# Altium PCB backup.PcbDoc (part 3 of 3)
Units mm, origin at the board's own origin, x right, y up, seen from the top; angles counter-clockwise.
Board outline 28.94 x 32.03 mm, 4 copper layers (Top Layer, Inner Layer 1, Inner Layer 2, Bottom Layer), stack 1.586 mm thick; 135 components, 83 nets, 442 pads, 355 vias.
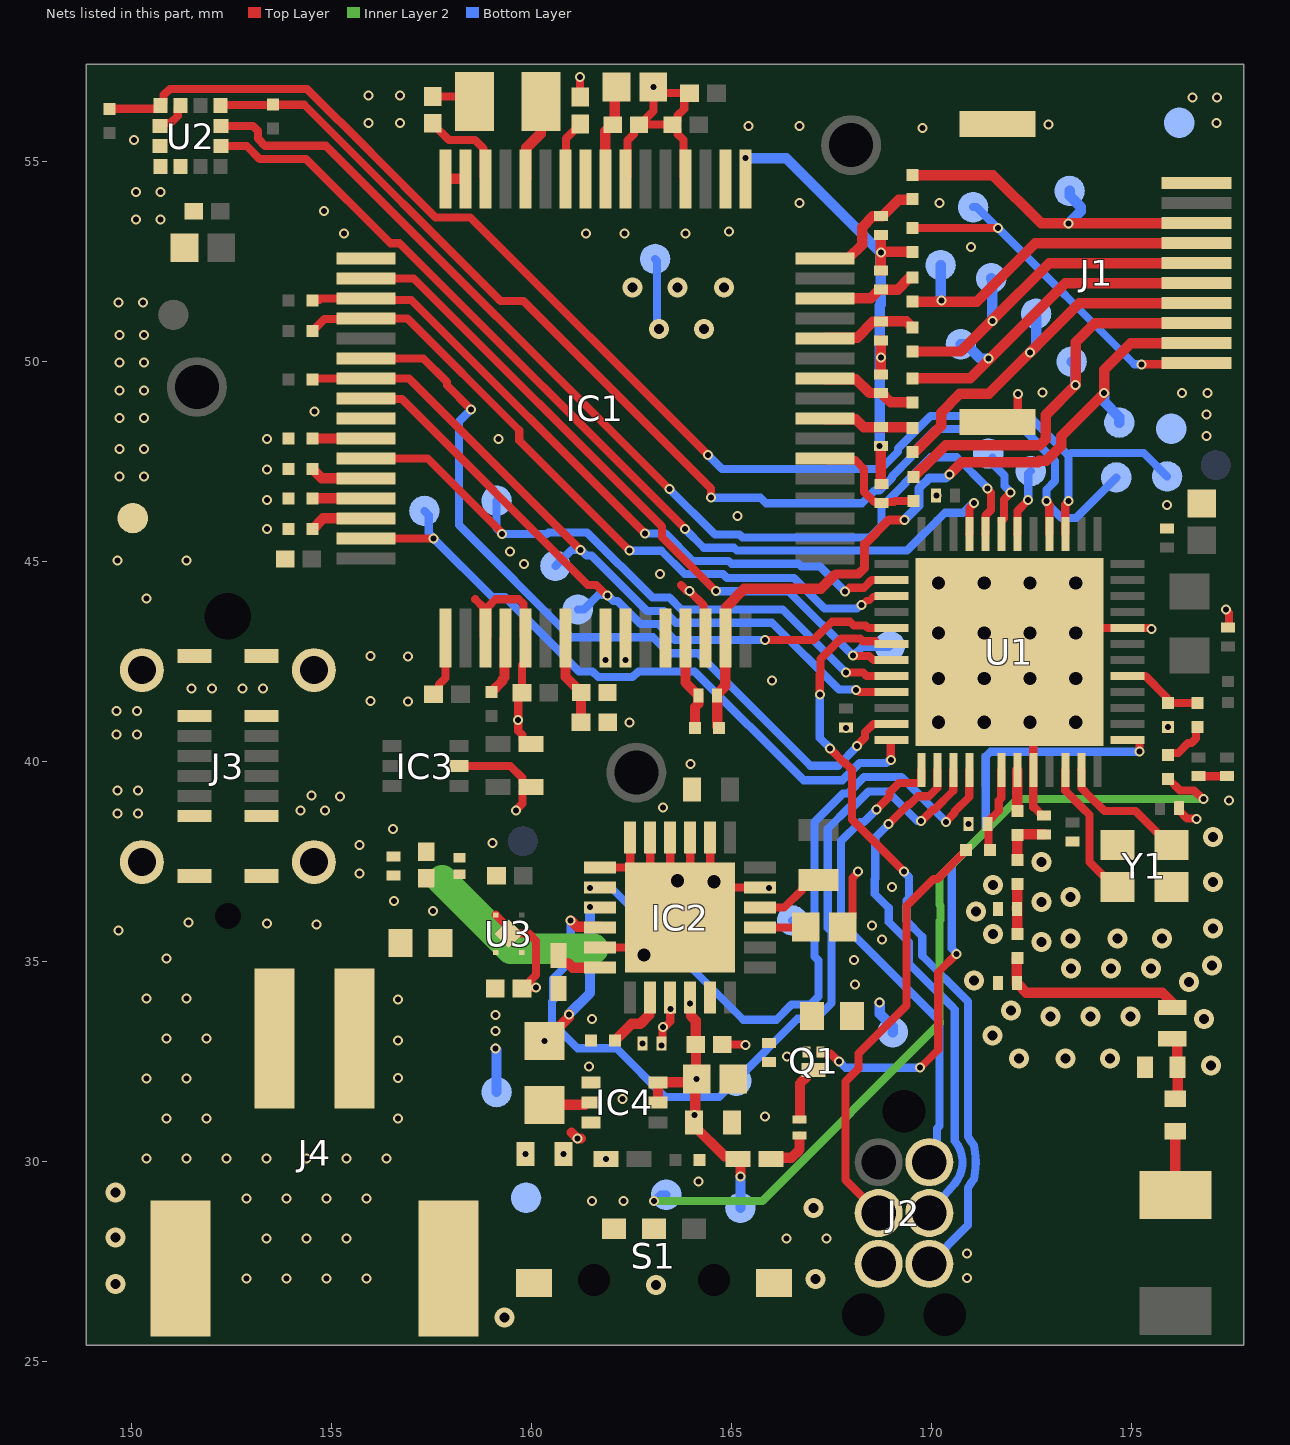
[diagram p4: the nets of this part, all layers, seen from the top]

## Via types
v1: diameter 0.25, hole 0.15, Top Layer to Bottom Layer, 295 vias
v2: diameter 0.5, hole 0.25, Top Layer to Bottom Layer, 41 vias
v3: diameter 0.66, hole 0.33, Top Layer to Bottom Layer, 19 vias

## Nets (pads, with @x,y where several pads share a name; then routed paths per layer and width w, separated by ;. In a path a pad name is that pad's centre, name@x,y a point inside that pad or via, vN(x,y) a via of type N, cw(c..) or ccw(c..) an arc to the next point about the centre after c; other vN are vias at no path point) (continued)
GND: C1.2 C2.2 C3.2 C4.2 C5.2 C6.2 C7.2 C8.2 C9.2 C10.1 C11.2 C12.1 C13.2 C14.2 C15.2 C16.2 C17.2 C18.2 C19.2 C20.2 C22.1 C23.1 C24.1 C25.1 C27.2 C28.1 C29.1 C30.1 C31.1 C32.2 C33.2 C34.2 C35.2 C42.2 C43.2 C44.2 C45.2 C46.1 C47.1 D1.2 IC1.18 IC1.20 IC1.23 IC1.25 IC1.31 IC1.32 IC1.33 IC1.41 IC1.49 IC1.51 IC1.53 IC1.57 IC1.58 IC1.60 IC1.62 IC2.2 IC2.3 IC2.4 IC2.5 IC2.6 IC2.7 IC2.11 IC2.23 IC2.25 IC3.2 IC4.4 J1.10 J1.11 J1.12 J2.5 J3.A1 J3.A12 J3.B1 J3.B12 J3.S1 J3.S2 J3.S3 J3.S4 J4.1 J4.MP1 J4.MP2 L7.1 Q1.3 R1.1 R2.2 R17.2 R18.2 R19.1 R24.1 R25.1 R26.1 R27.1 R29.2 S1.4 S1.5 TP6.1 TP15.1 TP18.1 TP28.1 TP31.1 U1.32 U1.44 U1.49 U2.3 U2.5 U2.6 U2.7 U2.8 U3.2 U3.5 Y1.2 Y1.4 | length 52.5
  Top Layer w0.203: U2.5@150.723,55.876 150.797,55.949 150.982,55.949 151.162,56.129 151.162,56.315 U2.3@151.236,56.389 ; C14.2@157.536,56.615 158.455,56.615 C13.2@158.58,56.49 ; C34.2@157.557,41.675 157.572,41.675 157.69,41.794 157.69,41.917 157.853,42.079 IC1.49@157.853,43.08 ; IC3.2@158.188,39.875 159.474,39.875 159.776,39.573 159.776,39.448 R17.2@159.874,39.35 ; 158.597,44.046 158.804,43.839 158.804,43.129 IC1.51@158.853,43.08 158.901,43.129 158.901,43.839 159.108,44.046 159.685,44.046 159.804,43.927 159.804,43.129 IC1.53@159.853,43.08 159.853,42.493 159.767,42.407 C27.2@159.767,41.712 159.673,41.618 159.673,41.03 v1(159.664,41.021) 159.673,41.012 159.673,40.75 159.776,40.648 159.776,40.523 159.874,40.425 R18.2@159.987,40.425 ; U3.2@159.111,36.157 159.436,35.832 U3.5@159.436,35.687 159.939,35.687 160.119,35.507 160.119,34.649 C44.2@159.802,34.332 ; v1(159.614,38.76) 159.614,38.773 159.776,38.936 159.776,39.252 R17.2@159.874,39.35 ; R17.2@159.987,39.35 R17.2@159.874,39.35 ; v1(160.122,34.341) 160.113,34.332 C44.2@159.802,34.332 ; v1(161.217,57.1) 161.218,57.099 C17.2@161.219,56.601 C17.2@161.219,56.601 ; IC2.11@161.723,35.337 162.631,35.337 v3(162.814,35.154) ; IC2.7@161.723,37.337 IC2.25@162.473,37.337 ; IC1.23@162.353,54.556 162.401,54.605 162.401,55.516 162.564,55.679 162.564,55.802 162.672,55.91 C19.2@162.692,55.91 C19.2@162.712,55.91 ; IC2.6@162.473,38.087 IC2.25@162.473,37.337 ; IC2.5@162.973,38.087 IC2.25@162.973,36.837 ; IC2.4@163.473,38.087 IC2.25@163.473,36.337 ; 163.744,44.399 163.871,44.272 163.919,44.272 163.944,44.247 v1(163.957,44.247) ; IC1.20@163.853,54.556 163.804,54.605 163.804,55.534 163.659,55.679 163.659,55.802 C1.2@163.551,55.91 ; v1@163.957,44.268 v1(163.957,44.247) ; C2.2@163.958,56.698 C2.2@163.943,56.698 ; IC2.3@163.973,38.087 163.973,36.337 IC2.25@163.723,36.087 IC2.25@163.473,36.337 ; IC1.62@164.353,43.08 164.304,43.129 164.304,43.9 v1(163.957,44.247) ; IC2.2@164.473,38.087 164.473,37.076 v3(164.567,36.982) 164.712,36.837 IC2.23@165.723,36.837 ; C4.2@164.77,32.918 165.321,32.918 165.341,32.898 v1(165.354,32.898) ; C6.2@167.785,35.85 168.028,36.093 168.028,37.079 168.173,37.224 v1(168.173,37.236) ; J1.11@171.65,48.475 171.938,48.475 172.161,48.698 v1(172.161,49.174) ; C23.1@172.822,38.642 172.772,38.642 172.575,38.838 172.55,38.838 U1.32@172.55,39.775 172.55,42.125 U1.49@171.95,42.725 172.55,43.325 U1.44@174.9,43.325 174.902,43.323 175.463,43.323 175.488,43.298 v1(175.501,43.298) ; C8.2@176.187,38.825 176.187,38.775 176.396,38.566 176.623,38.566 v1(176.632,38.557) ; C28.1@176.684,39.621 C29.1@177.395,39.621 ; v1(177.368,43.79) 177.368,43.777 177.444,43.701 177.444,43.341 C22.1@177.419,43.341 ; C44.2@159.802,34.332 159.787,34.332 C44.2@159.771,34.315 159.786,34.315 C44.2@159.802,34.332 ; IC2.25@162.473,37.337 IC2.25@162.973,36.837 ; C19.2@162.712,55.91 C1.2@163.531,55.91 C1.2@163.551,55.91 ; C19.2@162.712,55.91 163.051,56.249 v1(163.051,56.85) 163.203,56.698 C2.2@163.943,56.698 ; IC2.25@162.973,36.837 IC2.25@163.473,36.337 ; C1.2@163.551,55.91 163.659,56.019 163.659,56.142 163.824,56.307 163.824,56.579 C2.2@163.943,56.698
  Top Layer w0.262: IC1.32@157.853,54.556 IC1.31@158.353,54.556
  Bottom Layer w0.203: TP31.1@163.093,52.553 163.144,52.502 163.144,50.851 v2(163.195,50.8)
  other v1: 152.886,27.071 153.886,27.071 154.886,27.071 155.886,27.071 170.891,27.076 170.891,27.686 153.386,28.071 154.386,28.071 155.386,28.071 166.386,28.071 167.386,28.071 152.886,29.071 153.886,29.071 154.886,29.071 155.886,29.071 164.186,29.489 150.386,30.071 151.386,30.071 152.386,30.071 153.386,30.071 154.386,30.071 155.386,30.071 156.386,30.071 159.85,30.175 150.886,31.071 151.886,31.071 156.667,31.064 165.837,31.11 162.281,31.547 150.386,32.071 151.386,32.071 156.667,32.08 161.442,32.368 166.395,32.614 162.78,32.944 156.667,33.02 150.886,33.071 151.886,33.071 161.519,33.553 156.667,34.036 150.386,34.071 151.386,34.071 150.886,35.071 149.682,35.763 154.635,35.916 153.391,35.941 151.435,35.966 157.544,36.25 156.566,36.5 165.938,36.83 159.029,37.948 170.934,38.43 163.297,38.837 177.444,39.014 163.976,39.923 167.864,40.83 175.922,40.854 162.458,40.97 155.981,41.504 156.914,41.493 166.014,42.012 161.849,42.525 162.357,42.525 155.981,42.621 156.914,42.611 150.386,44.071 163.22,44.679 159.817,44.933 149.657,45.009 151.384,45.009 159.461,45.237 153.391,45.796 165.151,46.126 175.888,46.404 153.391,46.533 170.129,46.634 149.708,47.117 150.317,47.117 153.391,47.295 149.708,47.803 150.317,47.803 153.391,48.057 159.182,48.057 176.886,48.133 149.709,48.579 150.319,48.579 176.886,48.666 154.577,48.741 176.269,49.198 176.904,49.198 172.779,49.217 149.709,49.265 150.319,49.265 149.708,49.962 150.317,49.962 149.708,50.648 150.317,50.648 149.682,51.46 150.292,51.46 170.993,52.857 155.321,53.188 161.366,53.188 162.331,53.188 163.855,53.188 164.948,53.238 150.114,53.543 150.724,53.543 154.813,53.746 166.7,53.95 170.205,53.95 150.114,54.229 150.724,54.229 150.063,55.524 169.774,55.829 165.43,55.88 166.7,55.88 172.928,55.916 155.931,55.956 156.718,55.956 177.132,55.954 176.53,56.591 177.14,56.591 155.931,56.642 156.718,56.642
  other v2: 159.334,26.086 163.119,26.899 149.606,26.924 167.107,27.051 149.606,28.092 167.056,28.829 149.606,29.21 176.987,32.385 172.187,32.563 173.355,32.563 174.473,32.562 171.534,33.141 176.82,33.555 172.981,33.613 173.981,33.613 174.981,33.613 171.992,33.76 176.44,34.48 171.069,34.519 173.497,34.814 174.497,34.814 175.497,34.814 177.02,34.893 172.75,35.478 173.482,35.56 174.65,35.56 175.768,35.56 171.536,35.675 177.038,35.814 171.12,36.246 172.751,36.478 173.482,36.601 171.536,36.9 177.038,36.982 172.759,37.478 177.038,38.1 164.313,50.8 162.535,51.842 163.652,51.841 164.821,51.841
  other v3: 163.653,37.008 170.18,40.97 171.323,40.97 172.466,40.97 173.609,40.97 170.18,42.062 171.323,42.062 172.466,42.062 173.609,42.062 170.18,43.205 171.323,43.205 172.466,43.205 173.609,43.205 170.18,44.45 171.323,44.45 172.466,44.45 173.609,44.45
NetANT1_1: ANT1.1 L6.2 | length 1.6
  Top Layer w0.262: ANT1.1@176.1,29.15 L6.2@176.1,30.744
NetC6_1: C6.1 IC2.21 | length 1.1
  Top Layer w0.203: IC2.21@165.723,35.837 166.852,35.837 C6.1@166.865,35.85
NetC13_1: C13.1 IC1.28 | length 2.1
  Top Layer w0.262: IC1.28@159.853,54.556 159.872,54.575 159.872,55.328 160.23,55.686 160.23,56.479 C13.1@160.24,56.49
NetC14_1: C14.1 IC1.30 | length 2.3
  Top Layer w0.203: C14.1@157.536,55.945 157.536,55.93 157.942,55.525 158.595,55.525 158.804,55.315 158.804,54.605 IC1.30@158.853,54.556
NetC15_1: C15.1 C16.1 IC1.55 | length 2.3
  Top Layer w0.254: IC1.55@160.853,43.08 160.853,42.11 161.142,41.821 161.142,41.795 161.225,41.712 C15.1@161.245,41.712 161.242,41.709 161.242,40.978 C16.1@161.24,40.975
NetC17_1: C17.1 IC1.26 | length 1.5
  Top Layer w0.203: IC1.26@160.853,54.556 160.872,54.575 160.872,55.568 161.219,55.916 C17.1@161.219,55.931
NetC19_1: C19.1 C20.1 IC1.24 | length 2.4
  Top Layer w0.262: IC1.24@161.853,54.556 161.853,55.751 C19.1@162.012,55.91 ; C19.1@162.032,55.91 C19.1@162.012,55.91 ; C20.1@162.131,56.85 162.082,56.801 162.082,55.98 C19.1@162.012,55.91
NetC21_1: C21.1 L6.1 L7.2 | length 1.6
  Top Layer w0.262: C21.1@176.09,33.058 176.15,32.998 176.15,32.357 L7.2@176.156,32.35 176.156,31.613 L6.1@176.1,31.556
NetC23_2: C23.2 L3.2 L4.1 | length 1.3
  Top Layer w0.262: L4.1@172.15,37.525 L3.2@172.15,38.15 ; L3.2@172.168,38.168 C23.2@172.822,38.168
NetC24_2: C24.2 L4.2 L5.1 | length 1.3
  Top Layer w0.262: L5.1@172.15,35.675 172.143,35.682 172.143,36.294 C24.2@172.137,36.3 172.137,36.338 172.15,36.351 L4.2@172.15,36.925
NetC26_2: C26.2 IC1.61 R5.1 | length 2.4
  Top Layer w0.254: IC1.61@163.853,43.08 163.853,41.962 164.131,41.683 164.172,41.683 164.174,41.681 C26.2@164.174,41.635 164.172,41.633 164.172,41.432 164.094,41.354 R5.1@164.094,40.823
NetC31_2: C31.2 R6.1 U1.30 | length 2.2
  Top Layer w0.203: R6.1@171.472,37.776 171.431,37.817 171.431,38.407 C31.2@171.408,38.43 171.408,38.48 171.685,38.758 171.685,39.012 171.75,39.077 U1.30@171.75,39.775
NetC36_1: C36.1 C37.1 C38.1 C39.1 C40.1 C41.1 IC1.17 R12.2 | length 12.7
  Top Layer w0.262: C37.1@168.738,47.875 168.738,47.452 168.738,46.931 168.744,46.925 C36.1@168.75,46.925 ; C38.1@168.738,49.67 v1(168.738,50.094) C39.1@168.738,50.517 ; C40.1@168.738,52.261 v1(168.738,52.71) ; C41.1@168.738,53.15 v1(168.738,52.71) ; R12.2@169.525,52.729 168.757,52.729 v1(168.738,52.71)
  Bottom Layer w0.262: v1(165.35,55.075) 166.372,55.075 v1(168.738,52.71) 168.738,51.417 168.707,51.386 v1(168.707,47.879)
NetC36_2: C36.2 IC1.6 R10.2 | length 3
  Top Layer w0.203: IC1.6@167.341,47.568 167.389,47.52 168.1,47.52 168.311,47.309 168.311,47.253 168.321,47.243 168.321,46.731 168.577,46.474 168.727,46.474 C36.2@168.75,46.451 168.773,46.474 169.07,46.474 169.095,46.5 R10.2@169.55,46.5
NetC37_2: C37.2 IC1.8 R9.2 | length 2.3
  Top Layer w0.262: IC1.8@167.341,48.568 167.36,48.549 168.112,48.549 168.312,48.349 C37.2@168.738,48.349 169.501,48.349 R9.2@169.525,48.325
NetC38_2: C38.2 IC1.10 R8.2 | length 2.4
  Top Layer w0.262: IC1.10@167.341,49.568 167.36,49.549 168.112,49.549 168.459,49.202 168.732,49.202 C38.2@168.738,49.196 168.776,49.196 168.829,49.143 168.829,49.123 168.982,48.97 R8.2@169.525,48.97
NetC39_2: C39.2 IC1.12 R7.2 | length 2.4
  Top Layer w0.262: IC1.12@167.341,50.568 167.36,50.587 168.143,50.587 168.541,50.985 168.732,50.985 C39.2@168.738,50.991 169.374,50.991 R7.2@169.525,50.84
NetC40_2: C40.2 IC1.14 R4.2 | length 2.4
  Top Layer w0.262: IC1.14@167.341,51.568 168.481,51.568 168.7,51.787 C40.2@168.738,51.787 169.163,51.787 169.441,52.066 169.506,52.066 R4.2@169.525,52.085
NetC41_2: C41.2 IC1.16 R3.2 | length 3.1
  Top Layer w0.262: IC1.16@167.341,52.568 167.928,52.568 168.271,52.911 168.271,53.348 168.541,53.618 C41.2@168.732,53.618 ; C41.2@168.738,53.624 C41.2@168.732,53.618 ; R3.2@169.525,54.05 169.506,54.031 169.182,54.031 168.77,53.618 C41.2@168.732,53.618
NetF2_1: F2.1 J4.2
NetIC1_42: IC1.42 R24.2 | length 1.3
  Top Layer w0.262: R24.2@154.534,48.062 154.537,48.065 155.861,48.065 IC1.42@155.865,48.068
NetIC1_44: IC1.44 R25.2 | length 1.4
  Top Layer w0.262: R25.2@154.534,47.3 154.766,47.068 IC1.44@155.865,47.068
NetIC1_45: IC1.45 R26.2 | length 1.3
  Top Layer w0.262: R26.2@154.534,46.563 154.537,46.566 155.862,46.566 IC1.45@155.865,46.568
NetIC1_46: IC1.46 R27.2 | length 1.4
  Top Layer w0.262: R27.2@154.534,45.801 154.801,46.068 IC1.46@155.865,46.068
NetIC1_52: IC1.52 R20.1 | length 1.5
  Top Layer w0.254: R20.1@159.009,41.732 159.278,42 159.278,42.037 159.33,42.089 159.33,43.057 IC1.52@159.353,43.08
NetIC2_12: IC2.12 R2.1 | length 1.2
  Top Layer w0.262: R2.1@160.68,35.134 160.68,35.021 160.749,34.952 160.915,34.952 161.031,34.837 IC2.12@161.723,34.837
NetIC2_14: IC2.14 R1.2 | length 1.6
  Top Layer w0.262: R1.2@162.098,33.02 162.507,33.429 162.73,33.429 162.954,33.653 162.954,34.068 IC2.14@162.973,34.087
NetIC2_22: IC2.22 L1.2 | length 1.8
  Top Layer w0.203: IC2.22@165.723,36.337 166.324,36.337 166.777,36.79 166.777,36.852 166.95,37.025 L1.2@167.175,37.025
NetIC4_5: IC4.5 L8.1 | length 1.2
  Top Layer w0.254: L8.1@160.325,31.407 161.342,31.407 161.406,31.471 IC4.5@161.493,31.471
NetL3_1: L3.1 U1.31 | length 1
  Top Layer w0.262: L3.1@172.15,38.75 U1.31@172.15,39.775
NetLED1_1: LED1.1 Q1.1 | length 1.4
  Top Layer w0.254: LED1.1@166.718,31.066 166.718,31.943 166.883,32.108 166.883,32.233 166.931,32.281 Q1.1@167.056,32.281
NetLED1_2: LED1.2 R23.1 | length 1.3
  Top Layer w0.254: R23.1@165.869,30.023 165.929,30.082 166.504,30.082 166.708,30.287 LED1.2@166.708,30.612
NetR11_1: R11.1 R15.2 | length 1.2
  Top Layer w0.203: R11.1@175.922,40.158 175.971,40.207 176.172,40.207 176.415,40.449 176.501,40.449 176.62,40.568 176.62,40.815 R15.2@176.659,40.854
NRESET: J2.3 R6.2 | length 10.7
  Top Layer w0.203: J2.3@168.681,28.702 167.853,29.531 167.853,31.985 168.177,32.31 168.177,32.689 169.378,33.889 169.378,36.382 170.05,37.055 170.151,37.055 R6.2@170.872,37.776
NRF_ADS_CS: IC1.39 R16.1 TP10.1 U1.21 | length 18.5
  Top Layer w0.203: R16.1@154.534,49.535 154.568,49.568 IC1.39@155.865,49.568 156.94,49.568 v1(161.229,45.279) ; v1(168.123,41.783) 168.135,41.783 168.193,41.725 U1.21@169,41.725
  Bottom Layer w0.203: TP10.1@160.603,44.882 161,45.279 161.242,45.279 161.382,45.139 161.506,45.139 162.888,43.757 163.315,43.757 163.612,43.459 166.021,43.459 167.693,41.787 168.118,41.787 v1(168.123,41.783)
NRF_ADS_DIN: IC1.34 TP5.1 U1.19 | length 18.3
  Top Layer w0.203: IC1.34@155.865,52.068 157.062,52.068 163.267,45.863 163.267,45.597 v1(164.617,44.247) ; v1(168.041,42.637) 168.05,42.628 168.449,42.628 168.55,42.527 168.998,42.527 U1.19@169,42.525
  Bottom Layer w0.203: v1(164.617,44.247) 166.431,44.247 v1(168.041,42.637) 168.054,42.637 168.275,42.858 168.944,42.858 TP5.1@168.961,42.875
NRF_ADS_DOUT: IC1.43 TP9.1 U1.20 | length 16.3
  Top Layer w0.203: IC1.43@155.865,47.568 157.41,47.568 v1@159.281,45.697 ; v1(167.869,42.215) 167.873,42.211 168.298,42.211 168.384,42.125 U1.20@169,42.125
  Bottom Layer w0.203: TP9.1@159.131,46.507 159.131,45.822 159.264,45.688 v1(159.264,45.679) 160.392,45.679 160.428,45.715 161.397,45.715 163.025,44.087 163.452,44.087 163.749,43.79 166.285,43.79 167.86,42.215 v1(167.869,42.215)
NRF_ADS_DRDY: IC1.47 TP23.1 U1.24 | length 17.3
  Top Layer w0.203: IC1.47@155.865,45.568 v1(157.556,45.568) ; v1(168.986,40.025) 168.986,40.523 168.988,40.525 U1.24@169,40.525
  Bottom Layer w0.203: TP23.1@157.328,46.253 157.435,46.146 157.435,45.703 157.556,45.581 v1(157.556,45.568) 159.023,44.101 159.346,44.101 160.804,42.644 160.804,42.628 161.189,42.243 161.527,42.243 161.672,42.098 162.534,42.098 162.678,42.243 164.082,42.243 166.803,39.522 167.777,39.522 168.205,39.951 168.878,39.951 168.944,40.016 168.977,40.016 v1(168.986,40.025)
NRF_ADS_PWDN: IC1.35 R21.1 U1.14 | length 17.6
  Top Layer w0.203: R21.1@154.534,51.516 154.553,51.535 154.701,51.535 154.734,51.568 IC1.35@155.865,51.568 155.904,51.529 156.998,51.529 v1(162.841,45.686) ; v1(167.843,44.238) 167.856,44.238 167.952,44.334 168.32,44.334 168.509,44.523 168.998,44.523 U1.14@169,44.525
  Bottom Layer w0.203: v1(162.841,45.686) 163.354,45.686 164.036,45.004 164.931,45.004 165.002,44.933 166.68,44.933 166.747,44.865 167.216,44.865 v1(167.843,44.238)
NRF_ADS_RESET: IC1.36 R22.1 U1.15 | length 17.9
  Top Layer w0.178: v1(168.25,43.907) 168.269,43.907 168.378,44.017 168.452,44.017 168.549,44.114 168.989,44.114 U1.15@169,44.125
  Top Layer w0.203: R22.1@154.534,50.754 154.829,51.049 155.846,51.049 IC1.36@155.865,51.068 155.871,51.062 156.907,51.062 159.698,48.271 159.698,48.017 v1(162.455,45.26)
  Bottom Layer w0.203: v1(162.455,45.26) 163.249,45.26 163.835,44.673 164.794,44.673 164.891,44.577 166.568,44.577 167.334,43.811 168.141,43.811 168.237,43.907 v1(168.25,43.907)
NRF_ADS_SCLK: IC1.40 TP1.1 U1.17 | length 16.8
  Top Layer w0.203: IC1.40@155.865,49.068 155.883,49.05 156.766,49.05 161.41,44.406 161.623,44.406 161.886,44.143 v1(161.899,44.143) ; v1(165.837,43.028) 167.056,43.028 167.513,43.485 167.969,43.485 168.06,43.394 168.355,43.394 168.422,43.327 168.998,43.327 U1.17@169,43.325
  Bottom Layer w0.203: TP1.1@161.163,43.79 161.314,43.79 161.686,44.162 161.761,44.162 161.771,44.152 161.89,44.152 v1(161.899,44.143) ; v1@161.905,44.149 162.052,44.002 162.157,44.002 162.733,43.426 163.178,43.426 163.577,43.028 v1(165.837,43.028)
NRF_ADS_START: IC1.38 U1.23 | length 20
  Top Layer w0.203: IC1.38@155.865,50.068 157.297,50.068 157.892,49.473 157.892,49.397 v1(158.496,48.793) ; v1(168.146,40.373) 168.146,40.386 168.346,40.586 168.346,40.72 168.55,40.923 U1.23@169,40.925 U1.23@169,40.925
  Bottom Layer w0.203: v1(158.496,48.793) 158.191,48.489 158.191,45.899 160.994,43.096 163.042,43.096 163.44,42.697 164.16,42.697 166.973,39.885 167.672,39.885 167.921,40.134 167.921,40.136 168.146,40.361 v1(168.146,40.373)
NRF_IMU_INT1: U1.8 U2.12 | length 26.2
  Top Layer w0.203: U2.12@152.248,55.876 153.045,55.876 153.164,55.757 153.164,55.564 153.346,55.382 154.865,55.382 163.451,46.796 v1(163.459,46.796) ; U1.8@171.35,45.675 171.352,45.677 171.352,46.14 171.491,46.28 171.491,46.708 171.399,46.8 v1(171.399,46.812)
  Bottom Layer w0.203: v1(163.459,46.796) 164.591,45.664 165.204,45.664 165.275,45.593 168.469,45.593 168.759,45.884 168.759,46.354 169.347,46.941 169.347,46.958 169.984,47.596 170.636,47.596 171.39,46.841 171.39,46.821 v1(171.399,46.812)
NRF_IMU_INT2: U1.9 U2.11 | length 24.3
  Top Layer w0.203: U2.11@152.248,55.376 152.885,55.376 153.21,55.052 154.371,55.052 156.476,52.947 156.705,52.947 163.839,45.813 v1(163.839,45.805) ; U1.9@170.95,45.675 170.952,45.677 170.952,46.331 171.065,46.444 v1(171.065,46.457)
  Bottom Layer w0.203: v1(163.839,45.805) 164.31,45.334 165.068,45.334 165.139,45.263 169.393,45.263 170.338,46.208 170.789,46.208 171.014,46.433 171.029,46.433 171.052,46.457 v1(171.065,46.457)
NRF_IMU_SCL: R13.1 TP7.1 U1.4 U2.1 | length 30.6
  Top Layer w0.203: U2.1@152.236,56.389 152.246,56.399 153.533,56.399 R13.1@153.543,56.409 154.322,56.409 159.23,51.501 159.802,51.501 164.49,46.812 v1(164.49,46.584) ; v1(172.88,46.5) 172.88,46.487 172.95,46.417 U1.4@172.95,45.675
  Bottom Layer w0.203: v1(164.49,46.584) 165.734,46.584 165.871,46.446 168.265,46.446 168.584,46.766 168.704,46.766 169.017,47.078 169.017,47.119 169.494,47.596 169.494,47.676 170.117,48.298 172.301,48.298 173.096,47.504 173.096,46.999 172.881,46.785 172.881,46.516 172.872,46.507 172.881,46.498 172.881,46.454 173.254,46.081 173.614,46.081 TP7.1@174.625,47.092
NRF_IMU_SDA: R14.1 TP4.1 U1.3 U2.4 | length 34
  Top Layer w0.203: R14.1@149.454,56.307 150.662,56.307 150.736,56.38 U2.4@150.736,56.389 150.809,56.462 150.809,56.648 150.966,56.805 154.396,56.805 156.002,55.199 156.002,55.196 157.608,53.59 158.475,53.59 v1(164.414,47.65) ; U1.3@173.35,45.675 173.35,46.414 173.431,46.495 v1(173.431,46.507)
  Bottom Layer w0.203: v1(164.414,47.65) 164.765,47.299 168.731,47.299 169.164,47.733 169.164,47.813 169.98,48.628 172.438,48.628 173.431,47.635 ; v1(173.431,46.507) 173.431,47.635 ; TP4.1@175.895,47.117 175.311,47.701 173.497,47.701 173.431,47.635
NRF_LED_PWM: Q1.2 U1.37 | length 15.7
  Top Layer w0.203: Q1.2@167.231,32.726 167.231,32.689 167.232,32.687 167.477,32.687 167.678,32.487 v1(167.691,32.487) ; v1(169.723,32.334) 170.173,32.784 170.173,34.72 v1(170.632,35.179) ; U1.37@174.9,40.525 175.208,40.525 175.209,40.523 v1(175.209,40.234)
  Bottom Layer w0.203: v1(167.691,32.487) 167.703,32.487 167.856,32.334 v1(169.723,32.334) ; v1(170.632,35.179) 170.632,35.192 170.51,35.313 170.51,37.403 171.36,38.253 171.36,40.115 171.479,40.234 v1(175.209,40.234)
NRF_PMIC_CHG: IC2.8 TP24.1 U1.28 | length 18
  Top Layer w0.203: v1(170.373,38.48) 170.373,38.493 170.58,38.699 170.58,38.735 170.948,39.103 U1.28@170.95,39.775 U1.28@170.95,39.775
  Bottom Layer w0.203: v1(161.468,36.83) 161.477,36.821 162.01,36.821 165.298,33.533 166.126,33.533 166.507,33.914 166.974,33.914 167.178,34.118 167.178,35.019 167.081,35.116 167.081,36.017 ; TP24.1@166.522,36.017 167.081,36.017 ; v1(170.373,38.48) 169.255,39.599 168.32,39.599 167.914,39.192 167.793,39.192 167.081,38.48 167.081,36.017
NRF_PMIC_ERR: IC2.10 TP27.1 U1.27 | length 21.4
  Top Layer w0.203: v1(169.746,38.504) 169.758,38.504 170.046,38.791 170.081,38.791 170.548,39.258 170.548,39.773 U1.27@170.55,39.775
  Top Layer w0.254: v1(160.985,36.017) 161.143,35.86 161.7,35.86 IC2.10@161.723,35.837
  Bottom Layer w0.203: v1(160.985,36.017) 160.985,34.999 160.548,34.562 160.548,34.027 160.513,33.992 160.513,33.458 161.151,32.82 162.127,32.82 163.344,31.603 164.698,31.603 165.112,32.017 166.654,33.559 167.121,33.559 167.508,33.945 167.508,35.733 167.411,35.829 167.411,38.307 167.966,38.862 168.05,38.862 168.431,39.243 168.91,39.243 169.649,38.504 v1(169.746,38.504)
NRF_UART_RX: TP8.1 U1.7 | length 1.9
  Top Layer w0.203: U1.7@171.752,45.998 171.821,46.068 171.821,46.536 v1@171.983,46.698
  Bottom Layer w0.203: TP8.1@171.526,47.587 171.526,47.436 171.826,47.136 171.826,46.881 171.983,46.723 v1(171.983,46.711)
NRF_UART_TX: TP2.1 U1.6 | length 1.7
  Top Layer w0.203: U1.6@172.15,45.675 172.152,45.677 172.152,46.257 172.415,46.52 v1(172.415,46.533)
  Bottom Layer w0.203: v1(172.415,46.533) 172.424,46.542 172.424,47.189 TP2.1@172.486,47.251
NRF_VBAT: R15.1 R19.2 U1.41 | length 2.1
  Top Layer w0.203: U1.41@174.9,42.125 174.902,42.123 175.35,42.123 175.874,41.599 175.874,41.502 R19.2@175.922,41.454 R15.1@176.659,41.454
Pad1: J1.8 R3.1 TP19.1 | length 8.7
  Top Layer w0.262: R3.1@169.525,54.65 171.537,54.65 172.745,53.442 v1(173.431,53.442) 173.44,53.45 J1.8@176.63,53.45
  Bottom Layer w0.262: v1(173.431,53.442) 173.736,53.746 173.736,53.852 173.457,54.132 TP19.1@173.457,54.254
Pad2: J1.7 R4.1 TP21.1 | length 9.4
  Top Layer w0.262: R4.1@169.525,51.485 170.23,51.485 v1(170.256,51.511) 170.283,51.485 171.135,51.485 172.6,52.95 J1.7@177.35,52.95
  Bottom Layer w0.262: TP21.1@170.231,52.4 170.231,51.537 v1(170.256,51.511)
Pad3: J1.6 R7.1 TP25.1 | length 9.8
  Top Layer w0.262: R7.1@169.525,50.24 170.74,50.24 171.515,51.015 172.95,52.45 J1.6@177.35,52.45
  Bottom Layer w0.262: TP25.1@171.501,52.07 171.526,52.045 v1(171.526,51.003)
Pad4: J1.5 R8.1 TP29.1 | length 9.3
  Top Layer w0.262: R8.1@169.525,49.57 170.97,49.57 171.444,50.044 173.35,51.95 J1.5@176.981,51.95
  Bottom Layer w0.262: TP29.1@170.739,50.419 170.874,50.419 171.23,50.063 v1(171.425,50.063)
Pad5: J1.4 R9.1 TP20.1 | length 10.1
  Top Layer w0.262: R9.1@169.525,47.725 169.544,47.744 169.609,47.744 170.249,48.384 170.249,48.714 170.716,49.181 171.434,49.181 v1(172.471,50.218) 173.703,51.45 J1.4@176.884,51.45
  Bottom Layer w0.262: v1(172.471,50.218) 172.618,50.366 TP20.1@172.618,51.181
Pad6: J1.3 R10.1 TP22.1 | length 10.3
  Top Layer w0.262: R10.1@169.55,47.1 169.767,47.317 169.782,47.317 170.357,47.892 172.707,47.892 172.858,48.043 172.858,48.652 v1(173.609,49.403) 173.609,50.47 174.089,50.95 J1.3@176.63,50.95
  Bottom Layer w0.262: TP22.1@173.507,49.987 173.603,49.892 173.603,49.409 v1(173.609,49.403)
Pad7: J1.1 R12.1 TP26.1 | length 9.4
  Top Layer w0.203: R12.1@169.525,53.329 v1(171.664,53.329) ; v1(175.26,49.911) 175.269,49.92 176.6,49.92 J1.1@176.63,49.95
  Bottom Layer w0.203: TP26.1@171.044,53.848 171.133,53.848 171.651,53.329 v1(171.664,53.329) 175.073,49.92 175.251,49.92 v1(175.26,49.911)
Pad8: C26.1 IC1.63 J1.2 R5.2 TP30.1 | length 19.6
  Top Layer w0.229: 167.559,44.633 167.569,44.633 167.613,44.677 168.178,44.677 168.334,44.833 168.334,45.423 168.94,46.03 169.323,46.03 v1(169.325,46.031)
  Top Layer w0.262: R5.2@164.694,40.823 164.648,40.869 C26.1@164.648,41.635 164.648,41.673 164.853,41.878 IC1.63@164.853,43.08 164.872,43.099 164.872,43.852 165.324,44.304 167.234,44.304 167.559,44.629 167.559,44.633 ; v1(170.459,47.169) 170.764,47.473 172.67,47.473 172.7,47.503 172.868,47.503 173.247,47.882 173.247,48.126 v1(174.32,49.2) 174.32,49.784 174.986,50.45 J1.2@176.63,50.45
  Bottom Layer w0.229: v1(169.325,46.031) 169.331,46.031 169.69,46.39 169.69,46.816 169.947,47.074 170.358,47.074 170.454,47.169 v1(170.459,47.169)
  Bottom Layer w0.262: v1(174.32,49.2) 174.32,48.98 174.701,48.599 TP30.1@174.701,48.463
RF: C21.2 C25.2 L5.2 | length 4.9
  Top Layer w0.262: C25.2@172.137,34.412 172.143,34.406 172.181,34.406 172.373,34.214 175.768,34.214 C21.2@176.174,33.807 ; C25.2@172.137,34.488 C25.2@172.137,34.45 L5.2@172.137,35.062
SWDCLK: J2.4 U1.26 | length 13.1
  Top Layer w0.203: v1(168.935,38.43) 169.422,38.917 169.46,38.917 169.665,39.121 169.885,39.121 169.945,39.121 170.148,39.325 U1.26@170.15,39.775 U1.26@170.15,39.775
  Bottom Layer w0.203: v1(168.935,38.43) 168.6,38.095 168.6,37.06 168.587,37.046 168.587,36.681 168.935,36.332 168.935,35.979 169.443,35.471 169.443,34.933 170.527,33.849 170.586,33.79 170.586,30.504 cw(c169.951,29.972) 170.579,29.431 J2.4@169.951,28.702
SWDIO: J2.2 U1.25 | length 12.1
  Top Layer w0.203: v1(168.628,38.791) 168.957,39.12 168.957,39.214 169.195,39.452 169.748,39.452 169.75,39.453 U1.25@169.75,39.775
  Bottom Layer w0.203: v1(168.628,38.791) 168.318,38.48 168.224,38.48 167.742,37.998 167.742,35.966 170.202,33.506 170.202,30.875 170.142,30.816 170.142,30.163 J2.2@169.951,29.972
SWO: J2.6 U1.18 | length 18.9
  Top Layer w0.203: v1(167.211,41.659) 167.211,42.168 167.234,42.191 167.234,42.55 167.747,43.064 168.218,43.064 168.285,42.996 168.607,42.996 U1.18@168.677,42.927 ; v1(167.464,40.312) 167.829,39.947 167.851,39.947 168.015,39.782 168.015,38.537 169.315,37.238 v1(169.318,37.238)
  Bottom Layer w0.203: v1@167.211,41.655 167.211,40.577 167.464,40.324 v1(167.464,40.312) ; v1(169.318,37.238) 169.318,37.225 169.44,37.103 169.44,36.584 169.378,36.522 169.378,36.003 169.774,35.607 169.774,35.133 170.857,34.05 170.917,33.99 170.917,30.613 cw(c169.951,29.972) 170.966,30.532 171.065,30.396 171.1,30.122 cw(c169.951,29.972) 171.1,29.822 171.065,29.548 170.966,29.412 cw(c169.951,29.972) 170.917,29.331 170.917,28.397 170.857,28.338 J2.6@169.951,27.432
VBAT: C18.1 IC2.15 R11.2 S1.1 TP13.1 | length 22.5
  Top Layer w0.203: v1(163.254,32.894) C18.1@163.254,32.944 163.278,32.967 163.278,33.319 163.297,33.338 v1(163.297,33.35) 163.306,33.359 163.341,33.359 163.473,33.491 163.473,33.788 163.474,33.79 v1(163.474,33.807) ; R11.2@175.922,39.558 176.213,39.268 176.57,39.268 176.787,39.05 v1(176.8,39.05)
  Inner Layer 2 w0.203: v1(163.068,29.007) 165.777,29.007 170.205,33.435 170.205,36.003 170.231,36.029 170.231,36.382 170.205,36.408 170.205,37.099 172.157,39.05 v1(176.8,39.05)
  Bottom Layer w0.203: v1(163.068,29.007) 163.081,29.007 163.233,29.159 TP13.1@163.373,29.159
  other v1: 161.519,29.007 162.306,29.007
VBAT_PRE: F2.2 S1.3
VBOOST: C44.1 C47.2 IC4.6 R28.2 TP12.1 U3.3 U3.4 | length 1.4
  Top Layer w0.254: 161.004,30.714 v1(161.152,30.567) v1@161.238,30.567
  Bottom Layer w0.254: v1(159.106,32.817) 159.131,32.791 TP12.1@159.131,31.725
  other v1: 161.869,30.048 160.8,30.175 159.106,33.249 159.106,33.655
VBUS: C3.1 F1.2 IC2.17
VBUS_PRE: C32.1 C33.1 D1.1 F1.1 J3.A4 J3.A9 J3.B4 J3.B9 TP17.1 | length 5.4
  Top Layer w0.262: J3.B9@153.25,38.625 J3.B9@153.269,38.644
  Inner Layer 2 w0.762: 157.774,37.019 159.487,35.306 161.544,35.306
  Bottom Layer w0.262: v1(168.707,33.96) 168.707,33.689 169.037,33.359 TP17.1@169.037,33.223
  other v1: 168.097,34.417 168.072,35.027 168.767,35.544 168.519,35.888 169.013,36.857 155.702,37.186 155.702,37.897 156.54,38.303 149.657,38.684 150.165,38.684 154.229,38.76 154.838,38.76 155.219,39.116 154.508,39.141 149.657,39.268 150.165,39.268 149.631,40.665 150.139,40.665 149.631,41.25 150.139,41.25 151.508,41.815 152.016,41.815 152.778,41.815 153.286,41.815
VSYS: C4.1 C5.1 C46.2 IC2.9 IC2.16 IC4.2 IC4.3 L8.2 R23.2 TP16.1 | length 11.4
  Top Layer w0.254: v1(160.325,33.007) 160.35,33.007 160.94,33.597 v1(160.94,33.671) ; IC4.2@163.169,31.471 IC4.3@163.169,31.971 163.88,31.971 163.964,32.055 v1(164.132,32.055) ; v1(163.97,33.934) 163.996,33.908 163.996,33.623 164.11,33.509 C4.1@164.11,32.918 164.121,32.907 164.121,32.066 164.099,32.044 C46.2@164.099,31.151 ; v1(164.084,31.151) C46.2@164.099,31.151 ; R23.2@165.171,30.048 R23.2@165.098,30.121 ; v1(165.227,29.616) 165.227,29.975 165.155,30.047 165.024,30.047 R23.2@165.098,30.121 ; C46.2@164.099,31.151 164.099,30.996 C46.2@164.066,30.963 164.066,30.888 164.833,30.121 R23.2@165.098,30.121
  Bottom Layer w0.254: v1(160.94,33.671) 161.468,34.199 v1(161.468,36.347) ; TP16.1@165.227,28.829 v1(165.227,29.616)
XC1: U1.34 Y1.3 | length 3.5
  Top Layer w0.203: U1.34@173.35,39.775 173.35,39.26 173.794,38.815 173.952,38.659 173.952,37.475 174.303,37.123 174.377,37.123 Y1.3@174.65,36.85
XC2: U1.35 Y1.1 | length 3.3
  Top Layer w0.203: U1.35@173.75,39.775 U1.35@173.75,39.775 173.752,39.325 173.955,39.121 174.328,38.749 175.101,38.749 175.95,37.9 Y1.1@176,37.9
pads on no net: ANT1.2 IC1.27 IC1.29 IC1.37 IC1.64 IC2.13 IC2.18 IC2.24 IC3.5 J2.MH1 J2.MH2 J2.MH3 J3.A8 J3.B8 J3.MH1 J3.MH2 S1.2 S1.6 S1.7 U1.1 U1.2 U1.5 U1.11 U1.12 U1.13 U1.16 U1.29 U1.38 U1.39 U1.40 U1.42

## Polygon pours and split planes (outlines as drawn)
GND on Top Layer "Top Layer-GND" (solid, pour order 54): 167 vertices, not listed, extent 171.284,32.941 177.092,40.622
GND on Top Layer "NONET_L-01_P-001" (solid, remove dead copper, pour order 51): 148.869,57.425 148.874,57.429 177.825,57.429 177.825,25.375 177.8,25.4 148.869,25.4
+1.8V on Top Layer "NONET_L-01_P-001" (solid, pour order 47): 158.166,43.739 158.166,42.342 157.861,42.037 157.861,40.843 159.285,40.843 159.285,41.223 159.285,41.427 158.801,41.427 158.496,41.732 158.496,43.815 158.725,44.044 158.725,45.009 156.845,45.009 156.642,45.212 154.762,45.212 154.711,45.263 154.254,45.263 154.254,44.856 154.28,44.831 154.229,44.78 154.229,44.653 153.543,44.653 153.391,44.806 153.391,48.692 154.076,48.692 154.28,48.895 154.28,54.254 153.441,55.093 151.943,55.093 151.943,56.21 151.917,56.236 151.917,56.591 151.511,56.591 151.511,54.534 151.994,54.051 151.994,53.569 151.917,53.492 151.917,50.952 151.943,50.368 151.917,50.302 151.917,44.933 153.01,43.84 158.14,43.84 158.217,43.764
+5V on Top Layer "NONET_L-01_P-001" (solid, pour order 1): 166.014,47.193 166.649,47.193 168.072,47.193 168.072,44.958 168.046,44.933 166.014,44.933
GND on Top Layer "NONET_L-01_P-001" (solid, pour order 50): 171.856,35.3 171.126,35.3 170.739,35.687 170.739,36.728 170.739,36.754 171.247,37.287 171.856,37.287 171.856,37.008
VBAT_PRE on Top Layer "NONET_L-01_P-001" (solid, pour order 15): 157.429,35.103 157.429,29.261 158.775,29.261 158.953,29.083 158.953,27.559 163.754,27.559 163.754,28.626 161.153,29.416 159.487,29.489 159.487,31.598 158.725,32.36 158.75,32.385 158.75,35.585 158.521,35.814 157.353,35.814 157.429,35.738
+5V on Top Layer "NONET_L-01_P-001" (solid, pour order 13): 159.955,35.789 159.563,36.181 159.563,42.824 161.569,42.037 161.569,35.789
+1.8V on Top Layer "NONET_L-01_P-001" (solid, pour order 35): 174.029,40.217 174.066,40.18 174.066,39.345 174.473,38.938 175.26,38.938 175.26,38.786 175.616,38.43 176.187,38.43 176.187,38.9 175.616,39.472 175.616,39.726 175.514,39.827 175.031,39.827 174.777,40.217
+1.8V on Top Layer "NONET_L-01_P-001" (solid, pour order 34): 174.422,44.348 174.422,45.466 175.767,45.466 175.897,45.336 176.407,45.847 177.597,45.847 177.622,45.822 177.622,44.679 175.946,44.679 175.616,44.348
+1.8V on Top Layer "NONET_L-01_P-001" (solid, pour order 33): 164.821,37.668 164.897,37.592 167.97,37.592 167.97,40.97 167.919,41.021 168.097,41.199 169.139,41.199 169.164,41.224 169.113,41.275 169.113,41.478 167.157,41.478 167.081,41.554 166.903,41.377 165.1,41.377 165.1,40.462 164.744,40.462 164.744,39.599 164.744,38.557 164.821,38.481
VSYS on Top Layer "NONET_L-01_P-001" (solid, pour order 7): 163.805,33.934 163.805,32.791 163.627,32.791 162.941,32.106 162.941,31.344 163.373,31.344 163.525,31.191 163.525,30.455 164.516,30.455 164.592,30.378 164.592,31.826 164.592,32.461 164.262,32.791 164.262,33.63 164.135,33.757 164.135,33.934
VBOOST on Top Layer "NONET_L-01_P-001" (solid, pour order 29): 159.461,32.614 159.461,34.62 159.766,34.62 159.944,34.798 159.918,34.823 159.918,35.408 159.639,35.408 159.487,35.255 159.334,35.255 159.055,35.535 158.699,35.535 158.648,35.484 158.648,32.614
VBOOST on Top Layer "NONET_L-01_P-001" (solid, pour order 24): 161.265,31.115 161.239,31.14 160.985,31.14 160.426,30.582 160.426,29.743 162.077,29.743 162.179,29.642 162.179,30.632 161.696,31.115
VBUS on Top Layer "NONET_L-01_P-001" (solid, pour order 22): 167.519,34.195 164.89,34.195 164.592,34.493 164.313,34.493 164.313,33.642 164.141,33.471 164.795,32.817 166.218,32.817 166.421,33.02 167.284,33.02 167.284,33.96
VBUS_PRE on Top Layer "NONET_L-01_P-001" (solid, pour order 21): 167.64,32.817 168.478,32.817 169.697,34.036 169.697,37.389 168.808,37.389 167.386,35.966 167.386,34.442 167.64,34.188 167.64,34.011
VBUS_PRE on Top Layer "NONET_L-01_P-001" (solid, pour order 16): 153.683,40.996 153.708,41.021 154.572,41.021 154.572,41.351 153.632,42.291 151.168,42.291 151.117,42.342 151.016,42.24 151.016,41.91 150.889,41.91 150.533,41.554 150.288,43.053 149.001,43.053 149.06,36.474 149.581,36.474 150.33,36.474 150.321,37.414 151.346,37.414 153.657,37.414 153.657,37.44 153.962,37.744 153.886,37.821 153.886,37.973 152.692,37.973 152.209,38.456 152.032,38.456 152.006,38.481 152.006,38.76 151.219,38.76 151.194,38.786 151.066,38.786 151.066,39.802 151.041,39.827 151.016,39.802 150.33,39.802 150.33,40.386 151.016,40.386 151.016,40.996 151.168,40.996
VBUS_PRE on Top Layer "NONET_L-01_P-001" (solid, pour order 20): 156.159,36.627 156.134,36.652 155.372,36.652 155.372,37.973 156.058,38.659 158.039,38.659 158.064,38.684 158.394,38.354 158.394,37.44 156.413,37.44 156.159,37.186 156.159,36.652
VBUS_PRE on Top Layer "NONET_L-01_P-001" (solid, pour order 18): 153.67,38.76 153.67,39.014 154.076,39.421 155.778,39.421 155.778,38.964 155.321,38.506 152.832,38.506 152.832,38.735 152.857,38.76
VBAT on Top Layer "NONET_L-01_P-001" (solid, pour order 3): 161.788,28.044 161.153,28.679 161.153,29.416 163.5,29.416 163.5,29.003 162.567,28.07 161.813,28.07 161.786,28.043
NetF2_1 on Top Layer "VBAT" (solid, pour order 4): 155.048,33.529 155.048,35.44 155.651,36.043 157.048,36.043 157.048,35.081 156.6,35.081 156.098,34.579 156.098,33.529
GND on Inner Layer 1 "GND_L02_P002" (solid, pour order 2): 148.869,25.4 177.802,25.4 177.814,25.393 177.814,57.425 148.869,57.425
VSYS on Inner Layer 2 "NONET_L-01_P-001" (solid, pour order 28): 163.778,30.963 164.77,30.963 164.77,32.283 164.468,32.585 164.468,33.144 164.328,33.144 164.211,33.261 164.211,34.849 163.932,35.128 160.452,34.798 159.436,34.798 159.563,33.757 159.563,32.537 160.782,32.537 160.833,32.487 161.112,32.766 161.112,33.503 161.519,33.909 162.154,33.909 162.154,34.214 163.754,34.214 163.754,33.414 163.805,33.363 163.525,33.083 163.525,31.215
+1.8V on Inner Layer 2 "NONET_L-01_P-001" (solid, pour order 32): 164.821,37.668 164.922,37.77 164.922,41.25 165.075,41.25 170.434,46.888 177.8,46.888 177.8,39.395 177.786,39.381 173.533,39.381 173.533,39.776 172.847,40.462 172.822,40.437 171.577,40.437 170.866,39.954 170.866,37.668
GND on Inner Layer 2 "NONET_L-01_P-001" (solid, pour order 52): 148.869,57.429 177.8,57.429 177.825,57.404 177.8,57.379 177.8,25.4 148.869,25.4
VBAT on Inner Layer 2 "NONET_L-01_P-001" (solid, pour order 17): 161.432,28.016 160.873,29.388 161.976,29.388 161.9,33.147 161.976,33.147 162.865,34.036 163.627,34.036 163.627,33.02 163.551,32.944 163.551,29.261 163.551,28.88 162.992,28.016
+1.8V on Inner Layer 2 "NONET_L-01_P-001" (solid, pour order 36): 152.73,52.502 152.73,52.527 152.73,56.312 154.864,56.312 154.864,52.502 152.756,52.502
VBOOST on Inner Layer 2 "NONET_L-01_P-001" (solid, pour order 25): 162.179,29.743 162.179,30.632 160.706,32.106 159.741,32.106 159.487,32.36 159.487,34.646 159.588,34.646 159.893,34.95 159.893,35.408 159.664,35.408 159.41,35.154 159.08,35.484 159.08,35.509 158.826,35.509 158.648,35.331 158.648,29.667 162.103,29.667
VBUS_PRE on Inner Layer 2 "NONET_L-01_P-001" (solid, pour order 6): 161.671,35.589 161.671,36.957 161.671,37.414 162.103,37.414 165.887,37.414 165.887,36.19 167,35.077 160.604,35.077
VBUS_PRE on Inner Layer 2 "NONET_L-01_P-001" (solid, pour order 23): 165.887,37.414 169.24,37.414 169.24,33.604 168.237,32.601 167.64,32.601 167.64,34.087 165.887,36.19
VBUS_PRE on Inner Layer 2 "NONET_L-01_P-001" (solid, pour order 19): 149.047,43.053 158.42,43.053 158.42,37.516 158.42,36.424 149.2,36.424 149.047,36.424
+5V on Inner Layer 2 "NONET_L-01_P-001" (solid, pour order 11): 159.563,40.818 159.563,37.338 159.563,36.179 159.953,35.789 160.985,35.789 160.985,37.49 177.965,54.47 175.133,57.302 165.303,57.302 160.172,52.172 160.172,43.84 159.918,43.586 159.918,41.173
+5V on Inner Layer 2 "NONET_L-01_P-001" (solid, pour order 8): 160.122,41.123 160.147,41.148 160.147,43.815 163.017,43.815 163.093,43.739 163.093,42.316 161.849,42.316 160.655,41.123
GND on Bottom Layer "NONET_L-01_P-001" (solid, pour order 53): 148.869,57.429 177.8,57.429 177.8,25.4 148.869,25.4

## Keep-outs
Inner Layer 1:
  region: 171.856,37.474 171.873,37.49 171.463,37.49 170.739,36.766 170.739,35.687 171.374,35.052 171.856,35.052 171.856,35.225 171.856,37.375 171.856,37.474 171.873,37.49
Inner Layer 2:
  region: 171.856,37.474 171.873,37.49 171.463,37.49 170.739,36.766 170.739,35.687 171.374,35.052 171.856,35.052 171.856,35.225 171.856,37.375 171.856,37.474 171.873,37.49
Keep-Out Layer:
  rectangle: 171.3,25.4 177.8,31.9

## Other copper
Top Layer:
  pour cut-out: 171.856,37.744 170.904,37.744 170.872,37.776 169.986,36.89 169.986,35.251 170.44,34.798 171.873,34.798 171.873,35.3 170.994,35.3 170.536,35.759 170.536,36.805 171.003,37.272 171.856,37.272
  pour cut-out: 171.126,37.52 171.856,37.52 171.882,37.494 171.882,37.272 171.12,37.272 171.126,37.278
  pour cut-out: 171.126,35.3 171.856,35.3 171.882,35.275 171.882,35.052 171.12,35.052 171.126,35.058
Inner Layer 1:
  pour cut-out: 171.856,38.517 171.943,38.43 173.086,38.43 173.086,37.999 172.959,37.872 172.501,37.872 172.501,34.595 172.476,34.57 172.527,34.519 175.88,34.519 176.21,34.189 176.54,34.189 176.54,31.953 175.702,31.953 175.702,32.741 175.499,32.944 175.499,33.909 172.237,33.909 171.856,34.29
Inner Layer 2:
  pour cut-out: 171.907,38.456 171.933,38.43 173.076,38.43 173.076,37.998 172.949,37.871 172.491,37.871 172.491,34.595 172.466,34.569 172.517,34.519 175.87,34.519 176.2,34.188 176.505,34.188 176.505,31.979 176.53,31.953 175.692,31.953 175.692,32.741 175.489,32.944 175.489,33.909 175.463,33.934 172.288,33.934 171.907,34.315 171.907,38.43

## Silkscreen, mask and mechanical layers (free items; w line width, h text height)
Top Overlay:
  text "1.8" at 153.657,49.598 h1.02 r90
  text "GND" at 149.911,45.466 h1.02
Bottom Overlay:
  text "GND" at 172.288,55.55 h1.02
  text "GND" at 159.309,53.823 h1.02
  text "7" at 171.679,53.721 h1.02
  text "1" at 174.117,53.518 h1.02
  text "2" at 168.758,52.019 h1.02
  text "3" at 172.187,51.841 h1.02
  text "5" at 173.406,50.648 h1.02
  text "GND" at 174.6,50.571 h1.02
  text "4" at 171.247,49.657 h1.02
  text "6" at 173.939,49.352 h1.02
  text "EEG v1.0 / Rishabh Jain" at 153.416,49.276 h1.02
  text "8" at 173.203,47.93 h1.02
  text "DOUT" at 159.131,47.625 h1.02
  text "RX" at 169.017,47.119 h1.02
  text "CS" at 159.791,46.152 h1.02
  text "1.8" at 175.031,45.72 h1.02
  text "SCL" at 172.72,44.983 h1.02
  text "TX" at 170.231,44.882 h1.02
  text "DRDY" at 156.693,44.145 h1.02 r90
  text "SDA" at 174.219,43.459 h1.02
  text "SCK" at 157.074,42.85 h1.02
  text "5" at 160.122,38.075 h1.02
  text "CHG" at 163.654,35.177 h1.02
  text "VB" at 169.393,32.588 h1.02
  text "ER" at 166.167,30.886 h1.02
  text "VB" at 157.505,29.921 h1.02
  text "GND" at 156.921,27.457 h1.02
  text "VBAT" at 161.011,27.305 h1.02
  text "VS" at 165.024,25.654 h1.02
Top Solder:
  circle w0.75: c151.638,49.352 r0.375
  circle w0.75: c167.996,55.397 r0.375
Bottom Solder:
  circle w0.75: c151.638,49.352 r0.375
  circle w0.75: c167.996,55.397 r0.375
Mechanical 1:
  lines w0.025: 177.802,25.4 148.869,25.4 148.869,57.099 148.869,57.425 177.814,57.425 177.814,25.393